# Altium PCB PCB1.PcbDoc
Units mil, origin at the board's own origin, x right, y up, seen from the top; angles counter-clockwise.
Board outline 6000 x 4000 mil, 2 copper layers (Top Layer, Bottom Layer); 28 components, 48 nets, 152 pads, 3 vias.
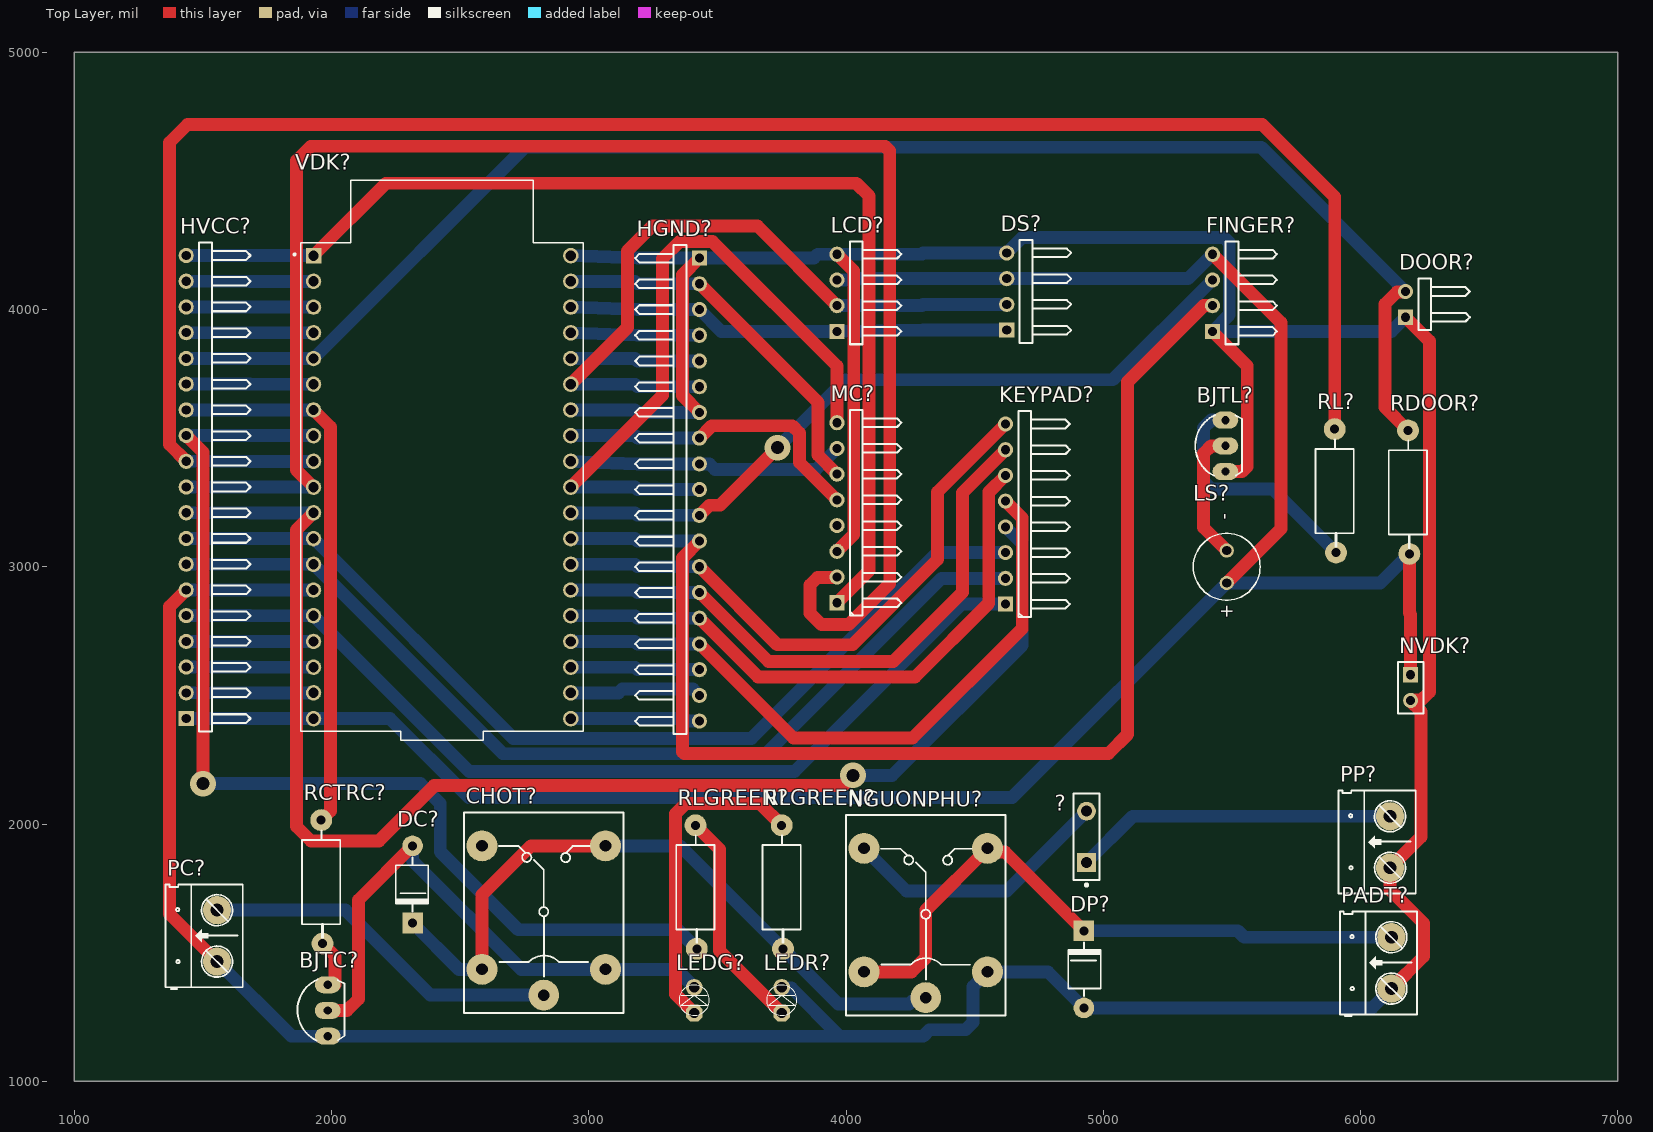
[diagram p0: Top Layer view]
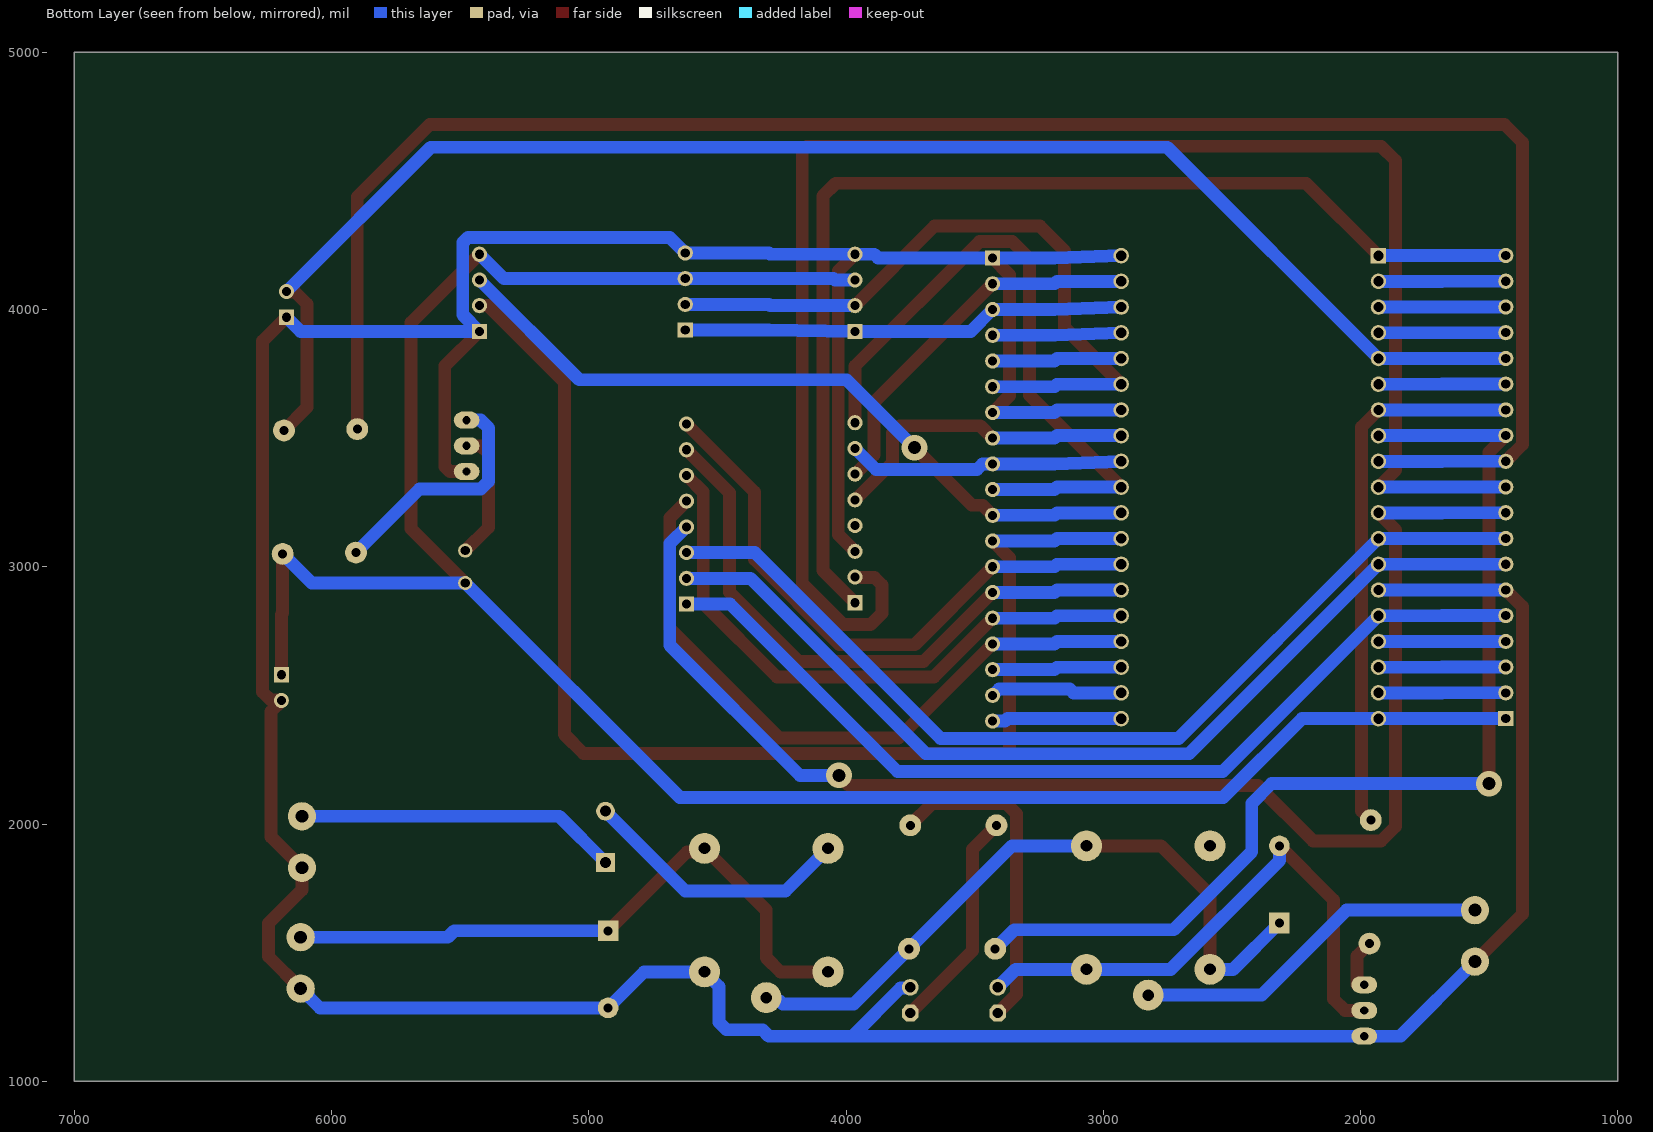
[diagram p1: Bottom Layer view, seen from below]
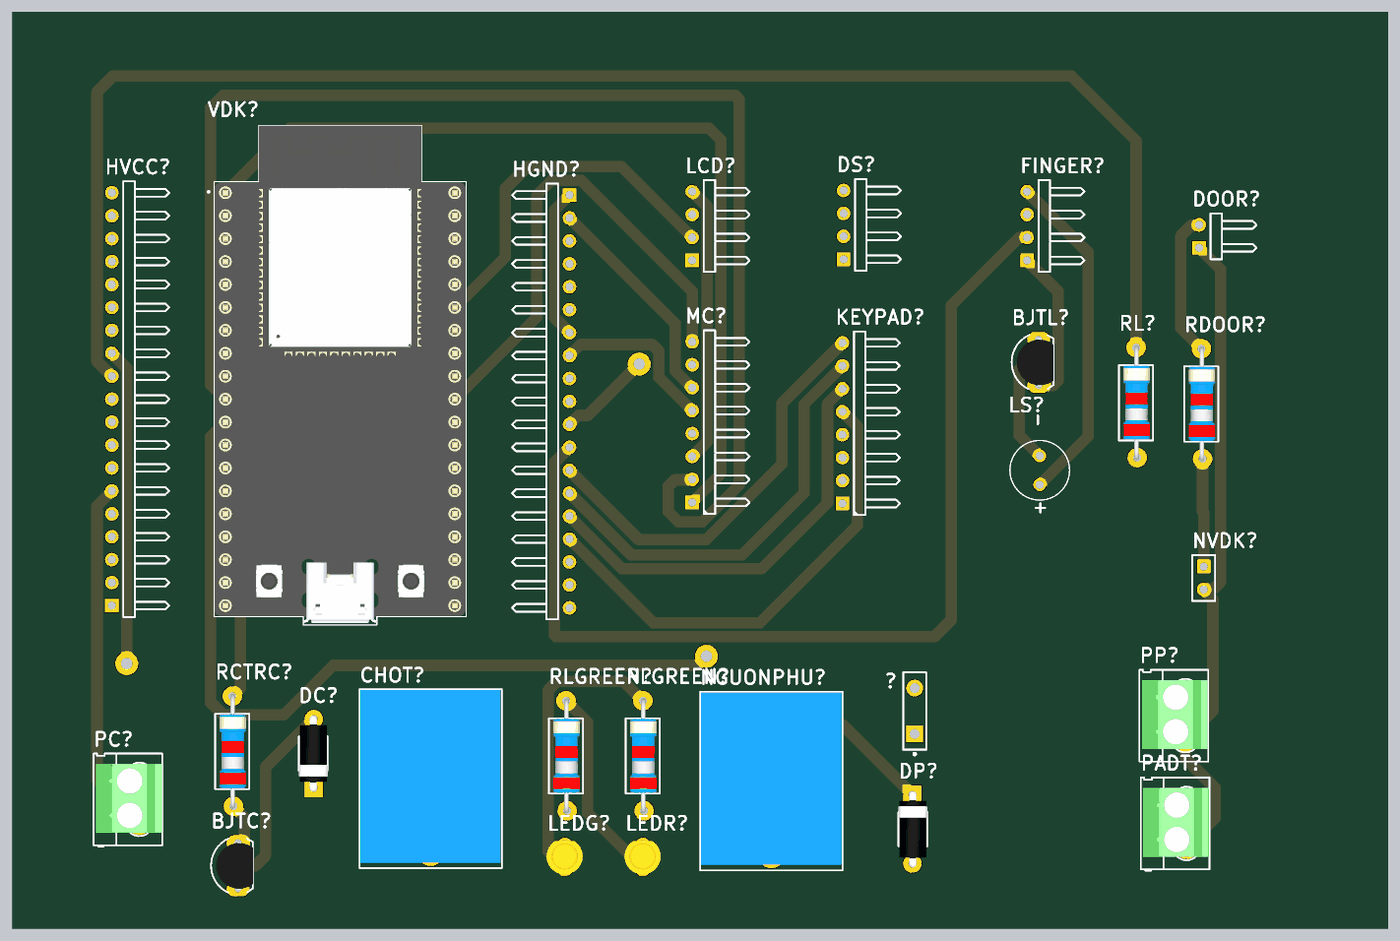
[diagram p2: 3D render of the assembled board from above, using the file's embedded part models]

## Layer stack, top to bottom
Top Solder: solder mask 0.4, Solder Resist, Dk 3.5
Top Layer: signal copper 1.4
Dielectric 1: dielectric 12.6, FR-4, Dk 4.8
Bottom Layer: signal copper 1.4
Bottom Solder: solder mask 0.4, Solder Resist, Dk 3.5

## Board outline
1000,1000 7000,1000 7000,5000 1000,5000

## Design rules (kind name [scope] priority, off if disabled: settings)
Clearance [All] p1: gap=10 ignorepadtopadclearanceinfootprint=FALSE except(0: Arc-Hole Track-Hole SMDPad-Hole THPad-Hole Via-Hole Fill-Hole Poly-Hole Region-Hole Text-Hole)
PolygonConnect [All] p1: connectstyle=Relief reliefconductorwidth=10 reliefentries=4 polygonreliefangle="90 Angle" airgapwidth=10
RoutingVias [All] p1: holewidth=50 width=100 viastyle="Through Hole" minholewidth=28 minwidth=50 maxholewidth=50 maxwidth=100
SolderMaskExpansion [All] p1: expansion=4 istentingtop=FALSE
Width [All] p1: maxlimit=100 minlimit=10 preferedwidth=50 minimp=50.000000 maximp=50.000000 favimp=50.000000
30 further rules are at their usual default settings.

## Components (designator, comment, footprint, x,y, rotation, side; value= is the part's Value field where it differs from the comment)
? "SW-SPST" SPST-2 4935,1950 r90 top
BJTC? "C1815" TO92 1985,1275 r90 top value=C9014
BJTL? "C1815" TO92 5475,3470 r90 top value=C9014
CHOT? "Relay 10A/12V" "RELAY 5" 2825,1660 r90 top value="Relay SPDT, 10A, 12V"
DC? "100v" "DIODE 1A" 2315,1965 r90 top
DOOR? "Header 2H" HDR1X2H 6175,3970 r90 top
DP? "100v" "DIODE 1A" 4925,1235 r270 top
DS? "Header 4H" HDR1X4H 4625,3920 r90 top
FINGER? "Header 4H" HDR1X4H 5425,3915 r90 top
HGND? "Header 19H" HDR1X19H 3430,4200 r270 top
HVCC? "Header 19H" HDR1X19H 1435,2410 r90 top
KEYPAD? "Header 8H" HDR1X8H 4620,2855 r90 top
LCD? "Header 4H" HDR1X4H 3965,3915 r90 top
LEDG? "LED" LED-3MM-YELLOW 3410,1265 r90 top value="LED 3 ly Single Colour"
LEDR? "LED" LED-3MM-YELLOW 3750,1265 r90 top value="LED 3 ly Single Colour"
LS? "CMT-6635C-030" CUI_CMT-6635C-030 5480,3000 r90 top
MC? "Header 8H" HDR1X8H 3965,2860 r90 top
NGUONPHU? "Relay 10A/12V" "RELAY 5" 4310,1650 r90 top value="Relay SPDT, 10A, 12V"
NVDK? "Header 2" HDR1X2 6195,2580 r270 top
PADT? "CON 2 KF301" "Con 2 KF301 5.08" 6120,1360 r90 top
PC? "CON 2 KF301" "Con 2 KF301 5.08" 1555,1465 r90 top
PP? "CON 2 KF301" "Con 2 KF301 5.08" 6115,1830 r90 top
RCTRC? "Res" RES-1/2W 1960,1755 r90 top
RDOOR? "Res" RES-1/2W 6185,3270 r90 top
RL? "Res" RES-1/2W 5900,3275 r90 top
RLGREEN? "Res" RES-1/2W 3415,1735 r90 top
RLGREEN? "Res" RES-1/2W 3750,1735 r90 top
VDK? "ESP32-DEVKITC" MODULE_ESP32-DEVKITC 2430,3310 r0 top

## Footprints (in the part's own frame and the unit in brackets; to place one, negate y for a bottom-side part, rotate by r counter-clockwise, add the part's x,y. Pads: shape width x height; smd on the part's side, far side on the other; paste and mask are expansions set on the pad)
"Con 2 KF301 5.08" [mil]
  round 110 hole 50: 1(0,0) 2(200,0)
  silkscreen extent -106,-100 300,200, body extent -45,-97 255,190, height 335
CUI_CMT-6635C-030 [mm]
  round 1.408 hole 0.9: N(1.6,0) P(-1.6,0)
  silkscreen extent -3.3,-3.3 3.3,3.3
"DIODE 1A" [mil] "Diode 1A"
  round 80 hole 35: 1(-50,0)
  rect 80x80 hole 35: 2(-350,0)
  silkscreen extent -305,-61 -95,65, body extent -366,-61 -34,65, height 122
HDR1X2 [mm] "Connector; Header; 2 Position"
  rect 1.5x1.5 hole 0.9: 1(0,0)
  round 1.5 hole 0.9: 2(2.54,0)
  silkscreen extent -1.27,-1.27 3.81,1.27
HDR1X2H [mm] "Connector; Header; 2 Position; Right Angle"
  rect 1.5x1.5 hole 0.9: 1(0,0)
  round 1.5 hole 0.9: 2(2.54,0)
  silkscreen extent -1.27,-6.35 3.81,-1.27
HDR1X4H [mm] "Connector; Header; 4 Position; Right Angle"
  rect 1.5x1.5 hole 0.9: 1(0,0)
  round 1.5 hole 0.9: 2(2.54,0) 3(5.08,0) 4(7.62,0)
  silkscreen extent -1.27,-6.35 8.89,-1.27
HDR1X8H [mm] "Connector; Header; 8 Position; Right Angle"
  rect 1.5x1.5 hole 0.9: 1(0,0)
  round 1.5 hole 0.9: 2(2.54,0) 3(5.08,0) 4(7.62,0) 5(10.16,0) 6(12.7,0) 7(15.24,0) 8(17.78,0)
  silkscreen extent -1.27,-6.35 19.05,-1.27
HDR1X19H [mm] "Connector; Header; 19 Position; Right Angle"
  rect 1.5x1.5 hole 0.9: 1(0,0)
  round 1.5 hole 0.9: 2(2.54,0) 3(5.08,0) 4(7.62,0) 5(10.16,0) 6(12.7,0) 7(15.24,0) 8(17.78,0) 9(20.32,0) 10(22.86,0) 11(25.4,0) 12(27.94,0) 13(30.48,0) 14(33.02,0) 15(35.56,0) 16(38.1,0) 17(40.64,0) 18(43.18,0) 19(45.72,0)
  silkscreen extent -1.27,-6.35 46.99,-1.27
LED-3MM-YELLOW [mil]
  oct 65x65 hole 40: 1(0,0)
  round 65 hole 40: 2(100,0)
  silkscreen extent -9,-59 109,59, body extent -27,-77 117,80, height 181
MODULE_ESP32-DEVKITC [mm]
  rect 1.53x1.53 / inner round 1.53 / far side rect 1.53x1.53 hole 1.02: 1(-12.7,22.85)
  round 1.53 hole 1.02: 2(-12.7,20.31) 3(-12.7,17.77) 4(-12.7,15.23) 5(-12.7,12.69) 6(-12.7,10.15) 7(-12.7,7.61) 8(-12.7,5.07) 9(-12.7,2.53) 10(-12.7,-0.01) 11(-12.7,-2.55) 12(-12.7,-5.09) 13(-12.7,-7.63) 14(-12.7,-10.17) 15(-12.7,-12.71) 16(-12.7,-15.25) 17(-12.7,-17.79) 18(-12.7,-20.33) 19(-12.7,-22.87) 20(12.7,-22.87) 21(12.7,-20.33) 22(12.7,-17.79) 23(12.7,-15.25) 24(12.7,-12.71) 25(12.7,-10.17) 26(12.7,-7.63) 27(12.7,-5.09) 28(12.7,-2.55) 29(12.7,-0.01) 30(12.7,2.53) 31(12.7,5.07) 32(12.7,7.61) 33(12.7,10.15) 34(12.7,12.69) 35(12.7,15.23) 36(12.7,17.77) 37(12.7,20.31) 38(12.7,22.85)
  silkscreen extent -14.67,-25 13.95,30.3, body extent -13.97,-24.8 13.97,30.3, height 3.25
"RELAY 5" [mil] "Reley DPDT, 8 pin, 1A, W400mil, L800mil,H 300mil"
  round 120 hole 45: 1(-325,0) 2(255,240) 3(255,-240) 4(-225,-240) 5(-225,240)
  silkscreen extent -395,-310 385,310, body extent -371,-304 381,306, height 602
RES-1/2W [mil]
  round 85 hole 35: 1(-220,-5) 2(260,0)
  silkscreen extent -195,-74 221,75, body extent -230,-60 270,56, height 121
SPST-2 [mm] "Switch; 2 Leads"
  rect 1.85x1.85 hole 1.1: 1(-2.54,0)
  round 1.85 hole 1.1: 2(2.54,0)
  silkscreen extent -4.89,-1.27 4.28,1.27
TO92 [mil] "TO-92"
  oval 66x100 hole 32: 1(-100,0) 2(0,0) 3(100,0)
  silkscreen extent -117,-65 120,118, body extent -109,-66 109,95, height 245

## Part data
?: "Single-Pole, Single-Throw Switch", LatestRevisionDate=17-Jul-2002, LatestRevisionNote="Re-released for DXP Platform.", PackageDescription="Switch; 2 Leads", PackageReference=SPST-2, Published=24-Mar-1999, Publisher="Altium Limited"
BJTC? BJTL?: "NPN transistor"
CHOT? NGUONPHU?: library part "Relay 5", "Relay SPDT,10A - 12VDC 5 Pin"
DC? DP?: library part "Diode 1N4007", "Cắm", Chung_Loai=Cắm, Don_Vi=Con, Ma_Hang=MH001063, Ten_Linh_Kien="Diode 1N4007 1A (DIP)"
DOOR?: "Header, 2-Pin, Right Angle", LatestRevisionDate=17-Jul-2002, LatestRevisionNote="Re-released for DXP Platform.", Publisher="Altium Limited"
DS? FINGER? LCD?: "Header, 4-Pin, Right Angle", LatestRevisionDate=17-Jul-2002, LatestRevisionNote="Re-released for DXP Platform.", Publisher="Altium Limited"
HGND? HVCC?: "Header, 19-Pin, Right Angle", LatestRevisionDate=17-Jul-2002, LatestRevisionNote="Re-released for DXP Platform.", Publisher="Altium Limited"
KEYPAD? MC?: "Header, 8-Pin, Right Angle", LatestRevisionDate=17-Jul-2002, LatestRevisionNote="Re-released for DXP Platform.", Publisher="Altium Limited"
LEDG? LEDR?: "LED Single colour Green and Red"
LS?: "6.6 mm, 3 Vo-p, 80 dB, Through Hole, Magnetic Audio Transducer Buzzer", Package="CUI Inc.", Availability=Unavailable, CUI_purchase_URL=https://www.cuidevices.com/product/audio/buzzers/audio-transducers/cmt-6635c-030?utm_source=snapeda.com&utm_medium=referral&utm_campaign=snapedaBOM, MF="CUI Devices", MP=CMT-6635C-030, Price=None, SnapEDA_Link=https://www.snapeda.com/parts/CMT-6635C-030/CUI%20Devices/view-part/2773120/?ref=snap
NVDK?: "Header, 2-Pin", LatestRevisionDate=17-Jul-2002, LatestRevisionNote="Re-released for DXP Platform.", Publisher="Altium Limited"
PADT? PC? PP?: "Cắm", Chung_Loai=Cắm, Don_Vi=Con, Ma_Hang=MH000987, Ten_Linh_Kien="CON 2 KF301-2P 5.08MM Xanh Dương"
RCTRC? RDOOR? RL? RLGREEN? RLGREEN?: Manufacturer="Generic Components", Class=Passive, Published=08/06/2000, Publisher="Altium Hobart Technology Centre", SubClass=R
VDK?: "ESP32-WROOM-32UE series Transceiver; 802.11 b/g/n (Wi-Fi, WiFi, WLAN), Bluetooth Â® Smart Ready 4.x Dual Mode Evaluation Board", Package=None, Availability="In Stock", Check_prices=https://www.snapeda.com/parts/ESP32-DEVKITC/Espressif+Systems/view-part/?ref=eda, MF="Espressif Systems", MP=ESP32-DEVKITC, Price=None, Purchase-URL=https://pricing.snapeda.com/search/part/ESP32-DEVKITC/?ref=eda, SnapEDA_Link=https://www.snapeda.com/parts/ESP32-DEVKITC/Espressif+Systems/view-part/?ref=snap

## Via types
v1: diameter 100, hole 50, Top Layer to Bottom Layer, 3 vias

## Nets (pads, with @x,y where several pads share a name; then routed paths per layer and width w, separated by ;. In a path a pad name is that pad's centre, name@x,y a point inside that pad or via, vN(x,y) a via of type N, cw(c..) or ccw(c..) an arc to the next point about the centre after c; other vN are vias at no path point)
3V3: HVCC?.19 MC?.1 VDK?.1 | length 4425.2
  Top Layer w50: VDK?.1 2211.39,4491 4040,4491 4090,4441 4090,2985 MC?.1
  Bottom Layer w50: HVCC?.19 1682,4210 1682.39,4209.61 VDK?.1
12V_ADT: DP?.2 NGUONPHU?.3 NGUONPHU?.5 PADT?.2 | length 2500.1
  Top Layer w50: NGUONPHU?.5 4255,1425 4310,1480 4310,1665 NGUONPHU?.3 4563.39,1891.61 4618.39,1891.61 4910,1600 DP?.2
  Bottom Layer w50: DP?.2 5523,1585 5548,1560 PADT?.2
BUZZER: HVCC?.11 RL?.2 VDK?.9 | length 7338.9
  Top Layer w50: HVCC?.11 1370,3475 1370,4649 1440,4719 5618,4719 5900,4437 RL?.2
  Bottom Layer w50: HVCC?.11 1682,3410 1682.39,3409.61 VDK?.9
C0: HVCC?.9 KEYPAD?.4 VDK?.11 | length 5388.4
  Top Layer w50: VDK?.11 1864,3143.61 1864,1990 1920,1934 2184,1934 2399,2149 3987,2149 v1(4027,2189)
  Bottom Layer w50: HVCC?.9 1682,3210 1682.39,3209.61 VDK?.11 ; v1(4027,2189) 4179,2189 4685,2695 4685,3090 KEYPAD?.4
C1: HVCC?.8 KEYPAD?.3 VDK?.12 | length 3805.9
  Bottom Layer w50: HVCC?.8 1682,3110 1682.39,3109.61 VDK?.12 2706.61,2333 3633,2333 4355,3055 KEYPAD?.3
C2: HVCC?.7 KEYPAD?.2 VDK?.13 | length 3772.8
  Bottom Layer w50: HVCC?.7 1682,3010 1682.39,3009.61 VDK?.13 2666.61,2273 3689,2273 4371,2955 KEYPAD?.2
C3: HVCC?.5 KEYPAD?.1 VDK?.15 | length 3705.7
  Bottom Layer w50: HVCC?.5 1682,2810 1682.39,2809.61 VDK?.15 2535.61,2204 3799.67,2204 4450.67,2855 KEYPAD?.1
CLK: HGND?.9 MC?.7 VDK?.30 | length 1078.3
  Bottom Layer w50: VDK?.30 3189.61,3400 HGND?.9 3469,3400 3491,3378 3883,3378 MC?.7
COM12V: CHOT?.3 CHOT?.5 DC?.2 NGUONPHU?.1 RLGREEN?.1@3755,1515 | length 2703.4
  Top Layer w50: CHOT?.5 2585,1725 2775,1915 CHOT?.3
  Bottom Layer w50: DC?.2 2495,1435 CHOT?.5 ; CHOT?.3 3355,1915 3755,1515 3970,1300 4245.71,1300 4257.32,1311.61 4296.61,1311.61 NGUONPHU?.1
CRX: HGND?.4 VDK?.35 | length 500.2
  Bottom Layer w50: VDK?.35 3189.61,3900 HGND?.4
CTRL_C: HVCC?.13 RCTRC?.2 VDK?.7 | length 2132
  Top Layer w50: VDK?.7 1996,3543.61 1996,2051 RCTRC?.2
  Bottom Layer w50: HVCC?.13 1682,3610 1682.39,3609.61 VDK?.7
CTX: HGND?.5 VDK?.34 | length 504
  Bottom Layer w50: VDK?.34 3180,3809.61 3189.61,3800 HGND?.5
DOOR: DOOR?.2 HVCC?.15 RDOOR?.2 VDK?.5 | length 5941.5
  Top Layer w50: DOOR?.2 6173.27,4068.27 6142.08,4068.27 6095,4021.18 6095,3620 RDOOR?.2
  Bottom Layer w50: HVCC?.15 1682,3810 1682.39,3809.61 VDK?.5 2751.39,4631 5614,4631 DOOR?.2
GND: BJTC?.1 BJTL?.1 DOOR?.1 DP?.1 DS?.4 FINGER?.1 HGND?.1 HGND?.7 HVCC?.6 LCD?.4 LEDR?.2 MC?.3 NGUONPHU?.4 NVDK?.2 PADT?.1 PC?.1 PP?.1 VDK?.14 VDK?.32 VDK?.38 | length 16967.9
  Top Layer w50: HVCC?.6 1370,2845 1370,1650 PC?.1 ; HGND?.7 3365,3665 3365,4135 HGND?.1 ; MC?.3 4030,3125 4030,4150 LCD?.4 ; FINGER?.1 5560,3780 5560,3390 5540,3370 BJTL?.1 ; PADT?.1 6245,1485 6245,1614 6115,1744 PP?.1 6235,1950 6235,2437.55 6195,2477.55 NVDK?.2 6196.73,2481.73 6236.33,2481.73 6268,2513.4 6268,3877 DOOR?.1
  Bottom Layer w50: HVCC?.6 1682,2910 1682.39,2909.61 VDK?.14 ; PC?.1 1845,1175 BJTC?.1 3975,1175 ; VDK?.32 3180,3609.61 3189.61,3600 HGND?.7 ; VDK?.38 3189.61,4200 HGND?.1 3875,4200 3890,4215 LCD?.4 4295,4215 4300,4220 DS?.4 4685,4280 5470,4280 5490,4260 5490,3980 FINGER?.1 6120,3915 DOOR?.1 ; LEDR?.2 3752.87,1362.13 3787.87,1362.13 3975,1175 ; PADT?.1 6045,1285 DP?.1 4785,1425 NGUONPHU?.4 4493.75,1368.75 4493.75,1229.29 4464.46,1200 4325,1200 4300,1175 3975,1175
LEDR: HVCC?.12 RLGREEN?.1@3420,1515 VDK?.8 | length 4171
  Top Layer w50: HVCC?.12 1500,3445 v1(1500,2157)
  Bottom Layer w50: HVCC?.12 1682,3510 1682.39,3509.61 VDK?.8 ; v1(1500,2157) 2345.82,2157 2422.82,2080 2422.82,1892.18 2726,1589 3346,1589 RLGREEN?.1@3420,1515
MISO: HGND?.8 MC?.5 VDK?.31 | length 1245.1
  Top Layer w50: HGND?.8 3478.04,3548.04 3791.2,3548.04 3819.24,3520 3819.24,3405.76 MC?.5
  Bottom Layer w50: VDK?.31 3180,3509.61 3189.61,3500 HGND?.8
MOSI: HGND?.2 MC?.6 VDK?.37 | length 1465.6
  Top Layer w50: HGND?.2 3890.81,3639.19 3890.81,3434.19 MC?.6
  Bottom Layer w50: VDK?.37 3180,4109.61 3189.61,4100 HGND?.2
Net?_1: ?.1 PP?.2 | length 1254.6
  Bottom Layer w50: ?.1 5115,2030 PP?.2
NetBJTC?_2: BJTC?.2 CHOT?.4 DC?.1 LEDG?.2 | length 2176.8
  Top Layer w50: BJTC?.2 2059.5,1275 2104.5,1320 2104.5,1704.5 DC?.1
  Bottom Layer w50: DC?.1 2315,1857.48 2737.48,1435 CHOT?.4 3340,1435 LEDG?.2
NetBJTC?_3: BJTC?.3 RCTRC?.1 | length 207.9
  Top Layer w50: RCTRC?.1 2013,1487 2013,1375 BJTC?.3
NetBJTL?_2: BJTL?.2 LS?.N | length 511.7
  Top Layer w50: BJTL?.2 5420,3470 5390,3440 5390,3152.99 LS?.N
NetBJTL?_3: BJTL?.3 RL?.1 | length 935.2
  Bottom Layer w50: BJTL?.3 5420,3570 5390,3540 5390,3332 5420,3302 5658,3302 RL?.1
NetHGND?_17: HGND?.17 VDK?.22 | length 504
  Bottom Layer w50: VDK?.22 3180,2609.61 3189.61,2600 HGND?.17
NetHGND?_18: HGND?.18 VDK?.21 | length 516.6
  Bottom Layer w50: VDK?.21 3115,2509.61 3130.2,2524.8 3405.2,2524.8 HGND?.18
NetHGND?_19: HGND?.19 VDK?.20 | length 504
  Bottom Layer w50: VDK?.20 3371.79,2409.61 3381.39,2400 HGND?.19
NetHVCC?_2: HVCC?.2 VDK?.18 | length 495.2
  Bottom Layer w50: HVCC?.2 1682,2510 1682.39,2509.61 VDK?.18
NetHVCC?_3: HVCC?.3 VDK?.17 | length 495.2
  Bottom Layer w50: HVCC?.3 1682,2610 1682.39,2609.61 VDK?.17
NetHVCC?_4: HVCC?.4 VDK?.16 | length 495.2
  Bottom Layer w50: HVCC?.4 1682,2710 1682.39,2709.61 VDK?.16
NetHVCC?_14: HVCC?.14 VDK?.6 | length 495.2
  Bottom Layer w50: HVCC?.14 1682,3710 1682.39,3709.61 VDK?.6
NetHVCC?_16: HVCC?.16 VDK?.4 | length 495.2
  Bottom Layer w50: HVCC?.16 1682,3910 1682.39,3909.61 VDK?.4
NetHVCC?_17: HVCC?.17 VDK?.3 | length 495.2
  Bottom Layer w50: HVCC?.17 1682,4010 1682.39,4009.61 VDK?.3
NetHVCC?_18: HVCC?.18 VDK?.2 | length 495.2
  Bottom Layer w50: HVCC?.18 1682,4110 1682.39,4109.61 VDK?.2
NetLEDG?_1: LEDG?.1 RLGREEN?.2@3750,1995 | length 1270
  Top Layer w50: LEDG?.1 3337,1338 3337,2040 3377,2080 3665,2080 RLGREEN?.2@3750,1995
NetLEDR?_1: LEDR?.1 RLGREEN?.2@3415,1995 | length 868.8
  Top Layer w50: RLGREEN?.2@3415,1995 3508,1902 3508,1507 LEDR?.1
P+: ?.2 NGUONPHU?.2 | length 1061.8
  Bottom Layer w50: NGUONPHU?.2 4235,1740 4625,1740 ?.2
PC: CHOT?.1 PC?.2 | length 1406.7
  Bottom Layer w50: PC?.2 2054,1665 2384,1335 CHOT?.1
R0: HGND?.13 KEYPAD?.8 VDK?.26 | length 2328.9
  Top Layer w50: HGND?.13 3733,2697 4025,2697 4356,3028 4356,3291 KEYPAD?.8
  Bottom Layer w50: VDK?.26 3180,3009.61 3189.61,3000 HGND?.13
R1: HGND?.14 KEYPAD?.7 VDK?.25 | length 2373.1
  Top Layer w50: HGND?.14 3698.5,2631.5 4183.62,2631.5 4453,2900.88 4453,3288 KEYPAD?.7
  Bottom Layer w50: VDK?.25 3180,2909.61 3189.61,2900 HGND?.14
R2: HGND?.15 KEYPAD?.6 VDK?.24 | length 2366
  Top Layer w50: HGND?.15 3658.5,2571.5 4268.1,2571.5 4555,2858.4 4555,3290 KEYPAD?.6
  Bottom Layer w50: VDK?.24 3180,2809.61 3189.61,2800 HGND?.15
R3: HGND?.16 KEYPAD?.5 VDK?.23 | length 2609
  Top Layer w50: HGND?.16 3796,2334 4259,2334 4685,2760 4685,3190 KEYPAD?.5
  Bottom Layer w50: VDK?.23 3180,2709.61 3189.61,2700 HGND?.16
RQ: MC?.4
RSTSPI: HVCC?.10 MC?.2 VDK?.10 | length 6432.1
  Top Layer w50: VDK?.10 1864,3375.61 1864,4579 1920,4635 4151,4635 4170,4616 4170,2935 4010,2775 3904.29,2775 3860,2819.29 3860,2928.98 3889.29,2958.27 3963.27,2958.27 MC?.2
  Bottom Layer w50: HVCC?.10 1682,3310 1682.39,3309.61 VDK?.10
RX2: FINGER?.2 HGND?.12 VDK?.27 | length 4937.1
  Top Layer w50: HGND?.12 3365,3035 3365,2280 3371,2274 5020,2274 5095,2349 5095,3719 5391,4015 FINGER?.2
  Bottom Layer w50: VDK?.27 3180,3109.61 3189.61,3100 HGND?.12
SCL: DS?.1 HGND?.3 LCD?.1 VDK?.36 | length 1730.4
  Bottom Layer w50: VDK?.36 3189.61,4000 HGND?.3 3515,3915 LCD?.1 4300,3920 DS?.1
SDA: DS?.2 HGND?.6 LCD?.2 VDK?.33 | length 2758.8
  Top Layer w50: VDK?.33 3150,3929.61 3150,4228 3246.53,4324.53 3655.47,4324.53 LCD?.2
  Bottom Layer w50: VDK?.33 3180,3709.61 3189.61,3700 HGND?.6 ; LCD?.2 4295,4015 4300,4020 DS?.2
SS: HGND?.10 MC?.8 VDK?.29 | length 2666.5
  Top Layer w50: VDK?.29 3287,3666.61 3287,4198 3353.53,4264.53 3480.47,4264.53 3965,3780 MC?.8
  Bottom Layer w50: VDK?.29 3180,3309.61 3189.61,3300 HGND?.10
TX2: FINGER?.3 HGND?.11 VDK?.28 | length 2878
  Top Layer w50: HGND?.11 3469,3239 3510,3239 v1(3734,3463)
  Bottom Layer w50: VDK?.28 3180,3209.61 3189.61,3200 HGND?.11 ; v1(3734,3463) 3998,3727 5037,3727 FINGER?.3
VCC: DS?.3 FINGER?.4 HVCC?.1 LCD?.3 LS?.P NVDK?.1 RDOOR?.1 VDK?.19 | length 8723
  Top Layer w50: FINGER?.4 5691,3949 5691,3148.01 LS?.P ; RDOOR?.1 6190,2820 6195,2815 NVDK?.1
  Bottom Layer w50: HVCC?.1 1682,2410 1682.39,2409.61 VDK?.19 2227.39,2409.61 2533.44,2103.56 4646.56,2103.56 LS?.P 6077.01,2937.01 RDOOR?.1 ; LCD?.3 4043,4115 4048,4120 DS?.3 5330,4120 FINGER?.4
pads on no net: CHOT?.2

## Text inside footprints (layer, text, board x,y; h text height)
LS?: Top Overlay "+" at 5502.52,2798.5 h50.18 r90; Top Overlay "-" at 5491.11,3182.69 h50.14 r90